# Altium PCB DBL 165 ShiftIn Red - TestButtonsPlate.PcbDoc
Units mm, origin at the board's own origin, x right, y up, seen from the top; angles counter-clockwise.
Board outline 152.4 x 101.6 mm, 2 copper layers (Top Layer, Bottom Layer); 22 components, 20 nets, 91 pads, 4 vias.
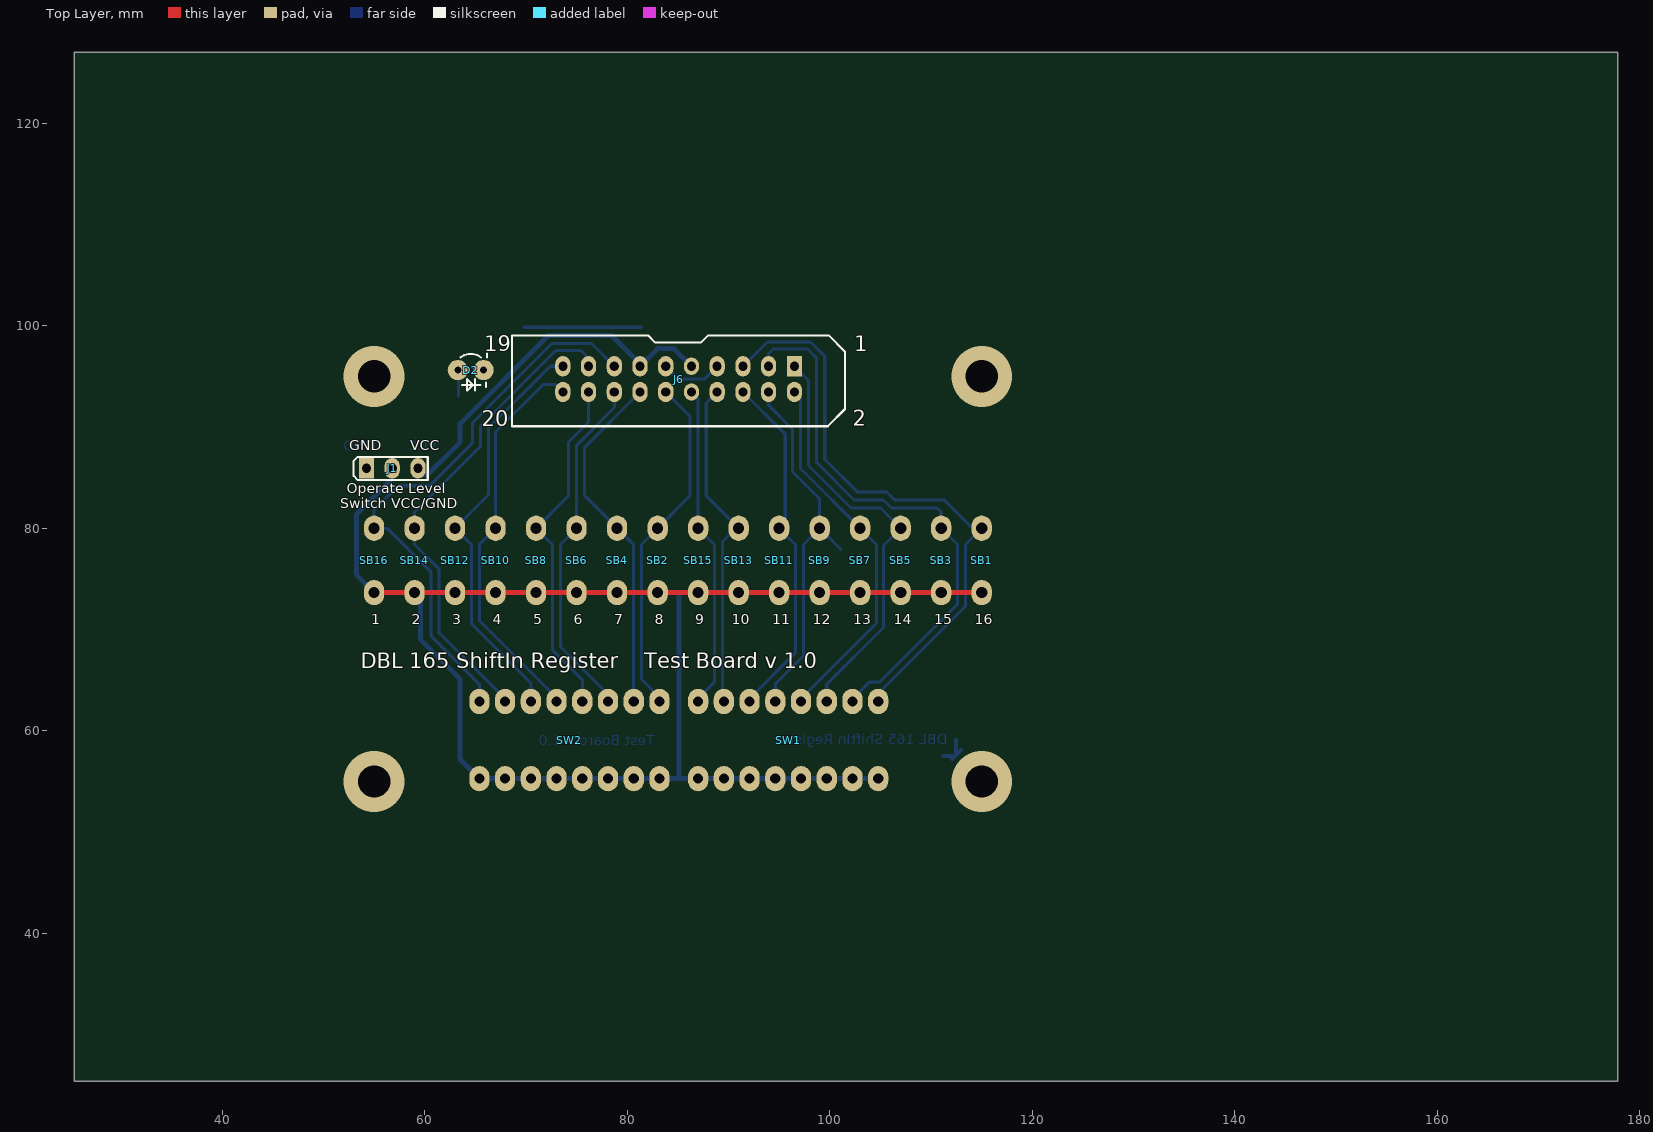
[diagram p0: Top Layer view]
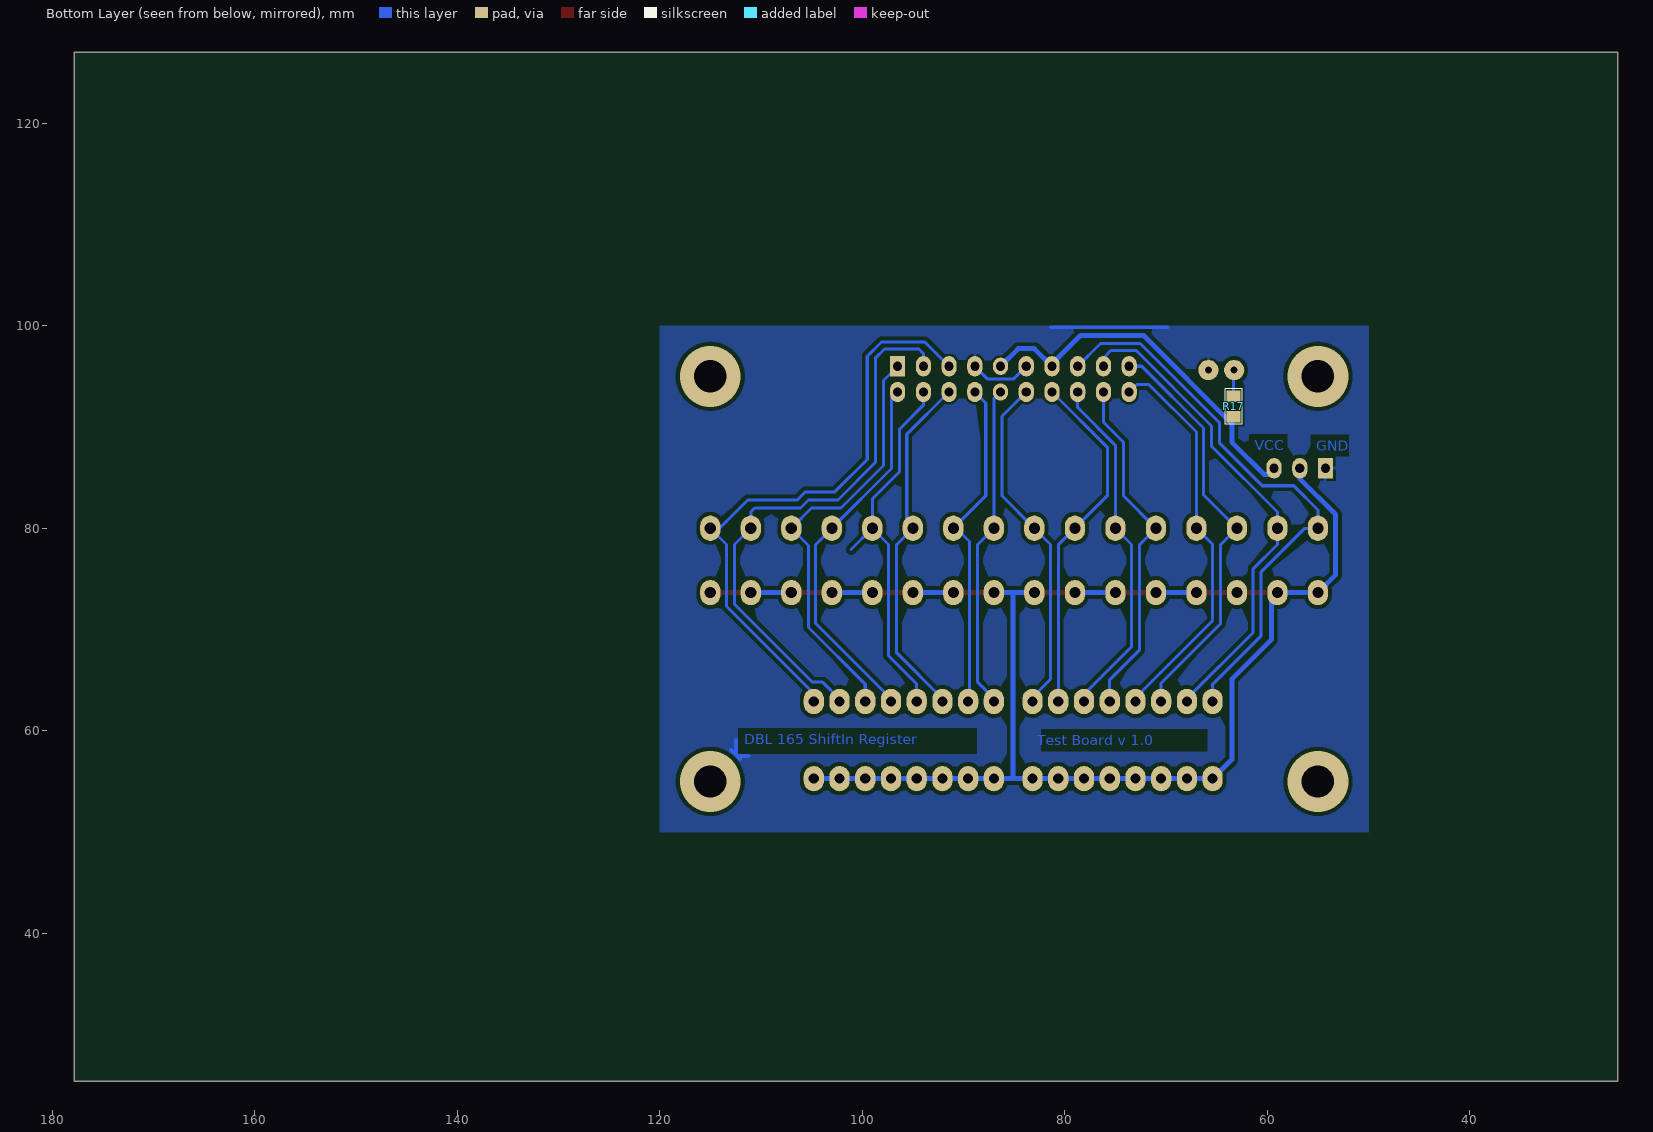
[diagram p1: Bottom Layer view, seen from below]
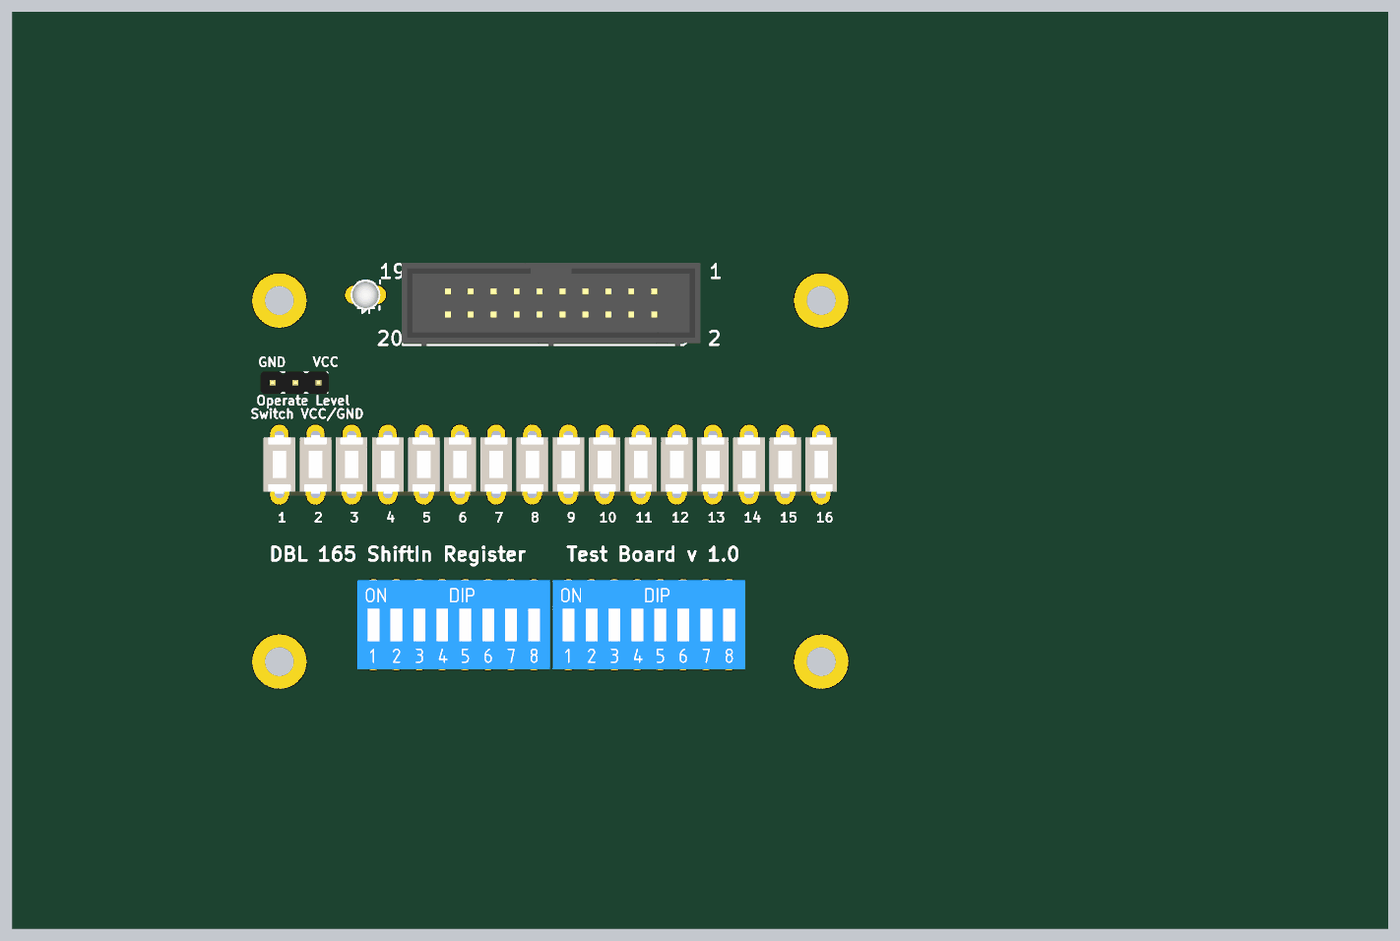
[diagram p2: 3D render of the assembled board from above, using the file's embedded part models]

## Layer stack, top to bottom
Top Solder: solder mask 0.0102, Solder Resist, Dk 3.5
Top Layer: signal copper 0.0356
Dielectric 1: dielectric 0.32, FR-4, Dk 4.8
Bottom Layer: signal copper 0.0356
Bottom Solder: solder mask 0.0102, Solder Resist, Dk 3.5

## Board outline
25.4,25.4 177.8,25.4 177.8,127 25.4,127

## Design rules (kind name [scope] priority, off if disabled: settings)
Clearance Clearance_1 [InComponent('J6') vs InNet('GND')] p1: gap=0.254
Clearance [All] p2: gap=0.4
PolygonConnect [All] p1: connectstyle=Relief reliefconductorwidth=0.254 reliefentries=4 polygonreliefangle="90 Angle" airgapwidth=0.254
RoutingVias [All] p1: holewidth=0.711 width=1.27 viastyle="Through Hole" minholewidth=0.711 minwidth=1.27 maxholewidth=0.711 maxwidth=1.27
SolderMaskExpansion [All] p1: expansion=0.102
Width [All] p1: maxlimit=2 minlimit=0.3 preferedwidth=0.3
29 further rules are at their usual default settings.

## Components (designator, comment, footprint, x,y, rotation, side; value= is the part's Value field where it differs from the comment)
D2 "FYL-3014GD" "LED Round 3mm Green" 63.275,95.625 r0 top
J1 "Operate Voltage Switch VCC/GND" "Line 2.54 X 3" 54.25,85.925 r90 top
J6 "To DBL 165 ShiftIn" "LINE 2.54 x 20D (2 x 10) - BH" 96.5,96 r270 top
R17 "4.7k Om" "SMD 0805 (2012)" 63.3,91 r90 bottom
SB1 "Button" "Switch Button 2P" 115,80 r0 top
SB2 "Button" "Switch Button 2P" 83,80 r0 top
SB3 "Button" "Switch Button 2P" 111,80 r0 top
SB4 "Button" "Switch Button 2P" 79,80 r0 top
SB5 "Button" "Switch Button 2P" 107,80 r0 top
SB6 "Button" "Switch Button 2P" 75,80 r0 top
SB7 "Button" "Switch Button 2P" 103,80 r0 top
SB8 "Button" "Switch Button 2P" 71,80 r0 top
SB9 "Button" "Switch Button 2P" 99,80 r0 top
SB10 "Button" "Switch Button 2P" 67,80 r0 top
SB11 "Button" "Switch Button 2P" 95,80 r0 top
SB12 "Button" "Switch Button 2P" 63,80 r0 top
SB13 "Button" "Switch Button 2P" 91,80 r0 top
SB14 "Button" "Switch Button 2P" 59,80 r0 top
SB15 "Button" "Switch Button 2P" 87,80 r0 top
SB16 "Button" "Switch Button 2P" 55,80 r0 top
SW1 "DIPSw" "DIP Switch 8p" 87,62.9 r0 top
SW2 "DIPSw" "DIP Switch 8p" 65.4,62.9 r0 top

## Footprints (in the part's own frame and the unit in brackets; to place one, negate y for a bottom-side part, rotate by r counter-clockwise, add the part's x,y. Pads: shape width x height; smd on the part's side, far side on the other; paste and mask are expansions set on the pad)
"DIP Switch 8p" [mm]
  oval 2x2.5 hole 1: 1(0,-7.62) 2(0,0) 3(2.54,-7.62) 4(2.54,0) 5(5.08,-7.62) 6(5.08,0) 7(7.62,-7.62) 8(7.62,0) 9(10.16,-7.62) 10(10.16,0) 11(12.7,-7.62) 12(12.7,0) 13(15.24,-7.62) 14(15.24,0) 15(17.78,-7.62) 16(17.78,0)
  body extent -1.75,-8.78 19.57,1.13, height 7
"LED Round 3mm Green" [mm]
  round 2 hole 0.7: A(0,0) K(2.54,0)
  silkscreen extent 0.25,-2.03 2.88,1.63, body extent -0.39,-1.65 2.91,1.64, height 5.51
"Line 2.54 X 3" [mm]
  rect 2x1.5 hole 0.9: 1(0,0)
  oval 2x1.5 hole 0.9: 2(0,-2.54) 3(0,-5.08)
  silkscreen extent -1.17,-6.05 1.12,1.27, body extent -1.27,-6.24 1.22,1.38, height 8.2
"LINE 2.54 x 20D (2 x 10) - BH" [mm]
  rect 2x1.5 hole 0.9: 1(0,0)
  oval 2x1.5 hole 0.9: 2(2.54,0) 3(0,-2.54) 4(2.54,-2.54) 5(0,-5.08) 6(2.54,-5.08) 7(0,-7.62) 8(2.54,-7.62) 11(0,-12.7) 12(2.54,-12.7) 13(0,-15.24) 14(2.54,-15.24) 15(0,-17.78) 16(2.54,-17.78) 17(0,-20.32) 18(2.54,-20.32) 19(0,-22.86) 20(2.54,-22.86)
  oval 1.7x1.5 hole 0.9: 9(0,-10.16) 10(2.54,-10.16)
  silkscreen extent -3.05,-27.87 5.92,5, body extent -3.18,-27.95 6.02,5.1, height 8.84
"SMD 0805 (2012)" [mil]
  rect 45x55 smd: 1(0.35,0.98) 2(80.35,0.98)
  silkscreen extent -29,-32 109,34, body extent 1,-24 80,26, height 18
"Switch Button 2P" [mm]
  oval 2x2.5 hole 1.1: 1(0,-6.35) 2(0,0)
  body extent -1.75,-6.99 1.75,0.69, height 5

## Part data
D2: library part "Led Round 3mm Green", "2.1v 10mA, 15-30mCd"
J1: library part PLS-3, "Vert, Sgl line, Male"
J6: library part "PLD-20 (2 x 10)", "Vert, Dbl line, Male"
R17: library part "Res All Types"
SB1 SB2 SB3 SB4 SB5 SB6 SB7 SB8 SB9 SB10 SB11 SB12 SB13 SB14 SB15 SB16: "Tact button"
SW1 SW2: library part "DIP Switch 8pos"

## Via types
v1: diameter 6, hole 3.2, Top Layer to Bottom Layer, 4 vias

## Nets (pads, with @x,y where several pads share a name; then routed paths per layer and width w, separated by ;. In a path a pad name is that pad's centre, name@x,y a point inside that pad or via, vN(x,y) a via of type N, cw(c..) or ccw(c..) an arc to the next point about the centre after c; other vN are vias at no path point)
+5V: J1.3 J6.9 J6.13 R17.1 | length 37.1
  Bottom Layer w0.5: J1.3@59.155,86.1 59.93,85.325 60.325,85.325 63.5,88.5 63.5,90.331 72.219,99.05 78.45,99.05 81.26,96.24 J6.13 83,97.74 84.6,97.74 J6.9
"B 1": J6.5 SB1.2 SW1.16 | length 59.5
  Bottom Layer w0.3: J6.5 93.82,98.4 98.1,98.4 99.5,97 99.5,86.8 102.7,83.6 105.6,83.6 106.4,82.8 111.3,82.8 114.1,80 SB1.2 113.4,78.4 113.4,72.3 104.78,63.68 SW1.16
"B 2": J6.3 SB3.2 SW1.14 | length 56.2
  Bottom Layer w0.3: J6.3 93.96,97.26 94.4,97.7 97.8,97.7 98.7,96.8 98.7,86.5 102.4,82.8 105.3,82.8 106.1,82 110.6,82 111,81.6 SB3.2 112.6,78.4 112.6,72.5 104.9,64.8 103.9,64.8 102.24,63.14 SW1.14 SW1.14@103,62.9
"B 3": J6.1 SB5.2 SW1.12 | length 42.2
  Bottom Layer w0.3: J6.1 97.9,94.6 97.9,86.2 102.1,82 105,82 SB5.2 105.3,78.3 105.3,70.2 99.7,64.6 SW1.12
"B 4": J6.2 SB7.2 SW1.10 | length 37
  Bottom Layer w0.3: J6.2 97.1,92.86 97.1,85.9 SB7.2 104.6,78.4 104.6,70.6 97.16,63.16 SW1.10
"B 5": J6.4 SB9.2 SW1.8 | length 37.4
  Bottom Layer w0.3: J6.4 93.96,92.14 96.3,89.8 96.3,85.6 99,82.9 SB9.2 ; SW1.8 94.62,64.62 97.4,67.4 97.4,78.4 SB9.2 ; 101.1,77.9 SB9.2
"B 6": J6.6 SB11.2 SW1.6 | length 35.1
  Bottom Layer w0.3: J6.6 95.6,89.28 95.6,80.6 SB11.2 96.6,78.4 96.6,67.7 92.08,63.18 SW1.6
"B 7": J6.8 SB13.2 SW1.4 | length 33.5
  Bottom Layer w0.3: J6.8 87.8,92.38 87.8,83.2 SB13.2 90.7,80 89.4,78.7 SW1.4@89.4,62.9 ; SW1.4@89.2,63.14 SW1.4@89.44,62.9
"B 8": J6.10 SB15.2 SW1.2 | length 32.2
  Bottom Layer w0.3: J6.10 87,92.8 SB15.2 88.6,78.4 88.6,64.8 87,63.2 SW1.2
"B 9": J6.12 SB2.2 SW2.16 | length 34.3
  Bottom Layer w0.3: SW2.16 83.18,63.32 81.4,65.1 81.4,78.4 SB2.2 86.2,83.2 86.2,91.06 J6.12
"B 10": J6.14 SB4.2 SW2.14 | length 34.8
  Bottom Layer w0.3: SW2.14 80.64,78.36 SB4.2 75.8,83.2 75.8,88 J6.14
"B 11": J6.16 SB6.2 SW2.12 | length 34.7
  Bottom Layer w0.3: SW2.12 78.1,63.6 73.4,68.3 73.4,78.4 SB6.2 75,88.2 78.72,91.92 J6.16
"B 12": J6.18 SB8.2 SW2.10 | length 34.6
  Bottom Layer w0.3: SW2.10 75.56,65.04 72.6,68 72.6,78.4 SB8.2 74.2,83.2 74.2,88.5 76.18,90.48 J6.18
"B 13": J6.20 SB10.2 SW2.8 | length 39.3
  Bottom Layer w0.3: SW2.8 73.02,63.28 65.4,70.9 65.4,78.4 SB10.2 67,89.5 71.7,94.2 72.9,94.2 J6.20
"B 14": J6.19 SB12.2 SW2.6 | length 41.3
  Bottom Layer w0.3: SW2.6 70.48,64.72 64.6,70.6 64.6,78.4 SB12.2 66.3,83.3 66.3,89.9 72.4,96 J6.19
"B 15": J6.17 SB14.2 SW2.4 | length 47.4
  Bottom Layer w0.3: SB14.2@59,78.9 59,78.4 61.4,76 61.4,69.7 67.94,63.16 SW2.4 ; SB14.2 59,81.6 65.5,88.1 65.5,90.1 72.95,97.55 75.45,97.55 76.18,96.82 J6.17
"B 16": J6.15 SB16.2 SW2.2 | length 56.6
  Bottom Layer w0.3: SW2.2 65.4,64.6 60.6,69.4 60.6,75.7 56.3,80 SB16.2 55,81.8 57.4,84.2 60.5,84.2 64.7,88.4 64.7,90.4 72.55,98.25 76.47,98.25 J6.15
GND: D2.K J1.1 J6.7 J6.11 | length 22.3
  Bottom Layer w0.3: 69.8,99.85 81.4,99.85 ; J6.11 85.075,94.725 87.605,94.725 J6.7
  Bottom Layer w0.4: 111.25,57.525 112.375,57.525 112.95,58.1 112.975,58.1 112.075,57.2 ; 112.444,59.085 112.45,57.75
NetD2_A: D2.A R17.2 | length 2.6
  Bottom Layer w0.3: D2.A 63.325,95.575 R17.2
OPERATESEL: J1.2 SB1.1 SB2.1 SB3.1 SB4.1 SB5.1 SB6.1 SB7.1 SB8.1 SB9.1 SB10.1 SB11.1 SB12.1 SB13.1 SB14.1 SB15.1 SB16.1 SW1.1 SW1.3 SW1.5 SW1.7 SW1.9 SW1.11 SW1.13 SW1.15 SW2.1 SW2.3 SW2.5 SW2.7 SW2.9 SW2.11 SW2.13 SW2.15 | length 181.3
  Top Layer w0.5: SB16.1 SB14.1 SB12.1 SB10.1 SB8.1 SB6.1 SB4.1 SB2.1 SB15.1 SB13.1 SB11.1 SB9.1 SB7.1 SB5.1 SB3.1 SB1.1
  Bottom Layer w0.5: J1.2 56.79,84.89 53.25,81.35 53.25,75.4 SB16.1 SB14.1 59.6,73.05 59.6,69 63.5,65.1 63.5,57.18 SW2.1 SW2.3 SW2.5 SW2.7 SW2.9 SW2.11 SW2.13 SW2.15 85.09,55.28 ; SB10.1 SB8.1 ; SB6.1 SB4.1 ; SB2.1 85.2,73.65 ; SB15.1 85.2,73.65 ; SB13.1 SB11.1 ; SB9.1 SB7.1 ; SW1.15 SW1.13 SW1.11 SW1.9 SW1.7 SW1.5 SW1.3 SW1.1 85.09,55.28 ; SB5.1 SB3.1 ; 85.09,55.28 85.09,73.54 85.2,73.65
copper on no net:
  other v1: 55,55 115,55 55,95 115,95

## Polygon pours and split planes (outlines as drawn)
GND on Bottom Layer "Top Layer-No Net" (solid, pour order 2): 120,100 50,100 50,50 120,50

## Other copper
Bottom Layer:
  text "VCC" at 61.25,87.725 h1
  text "GND" at 55.15,87.675 h1
  text "DBL 165 ShiftIn Register" at 111.625,58.675 h1
  text "Test Board v 1.0" at 82.7,58.575 h1

## Silkscreen, mask and mechanical layers (free items; w line width, h text height)
Top Overlay:
  text "VCC" at 58.575,87.725 h1
  text "GND" at 52.525,87.7 h1
  text "Operate Level" at 52.325,83.45 h1
  text "Switch VCC/GND" at 51.675,81.975 h1
  text "1" at 54.7,70.5 h1
  text "2" at 58.7,70.5 h1
  text "3" at 62.7,70.5 h1
  text "4" at 66.7,70.5 h1
  text "5" at 70.7,70.5 h1
  text "6" at 74.7,70.5 h1
  text "7" at 78.7,70.5 h1
  text "8" at 82.7,70.5 h1
  text "9" at 86.7,70.5 h1
  text "10" at 90.3,70.5 h1
  text "11" at 94.3,70.5 h1
  text "12" at 98.3,70.5 h1
  text "13" at 102.3,70.5 h1
  text "14" at 106.3,70.5 h1
  text "15" at 110.3,70.5 h1
  text "16" at 114.3,70.5 h1
  text "DBL 165 ShiftIn Register    Test Board v 1.0" at 53.7,66.2 h1.5

## Text inside footprints (layer, text, board x,y; h text height)
J6: Top Overlay "1" at 102.425,97.5 h1.52; Top Overlay "2" at 102.275,90.1 h1.52; Top Overlay "19" at 65.9,97.5 h1.52; Top Overlay "20" at 65.625,90.075 h1.52